# EAGLE board T11-MIDITheremin (EAGLE 7.7.0)
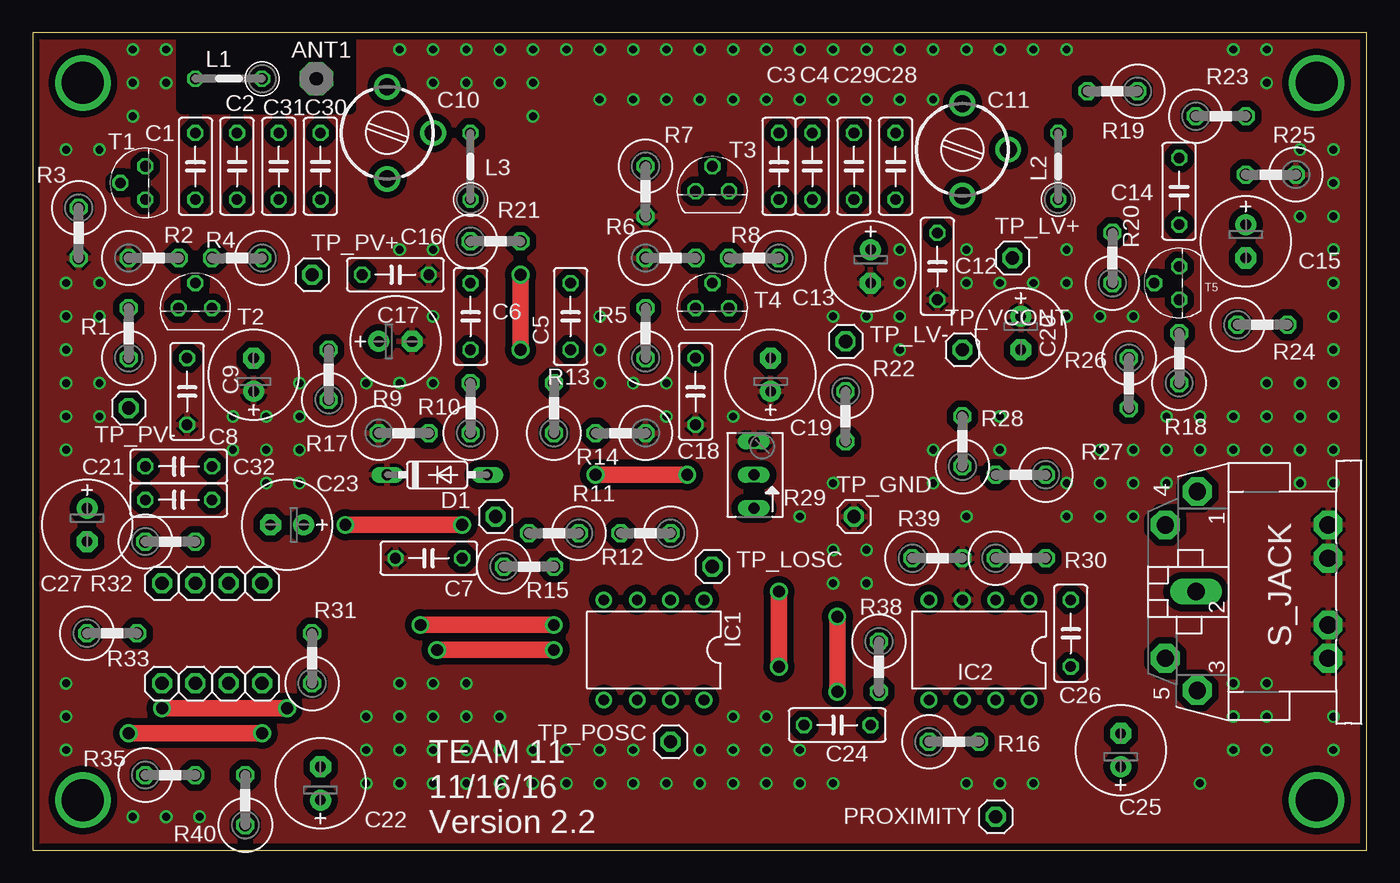
[diagram p0: board, top side]
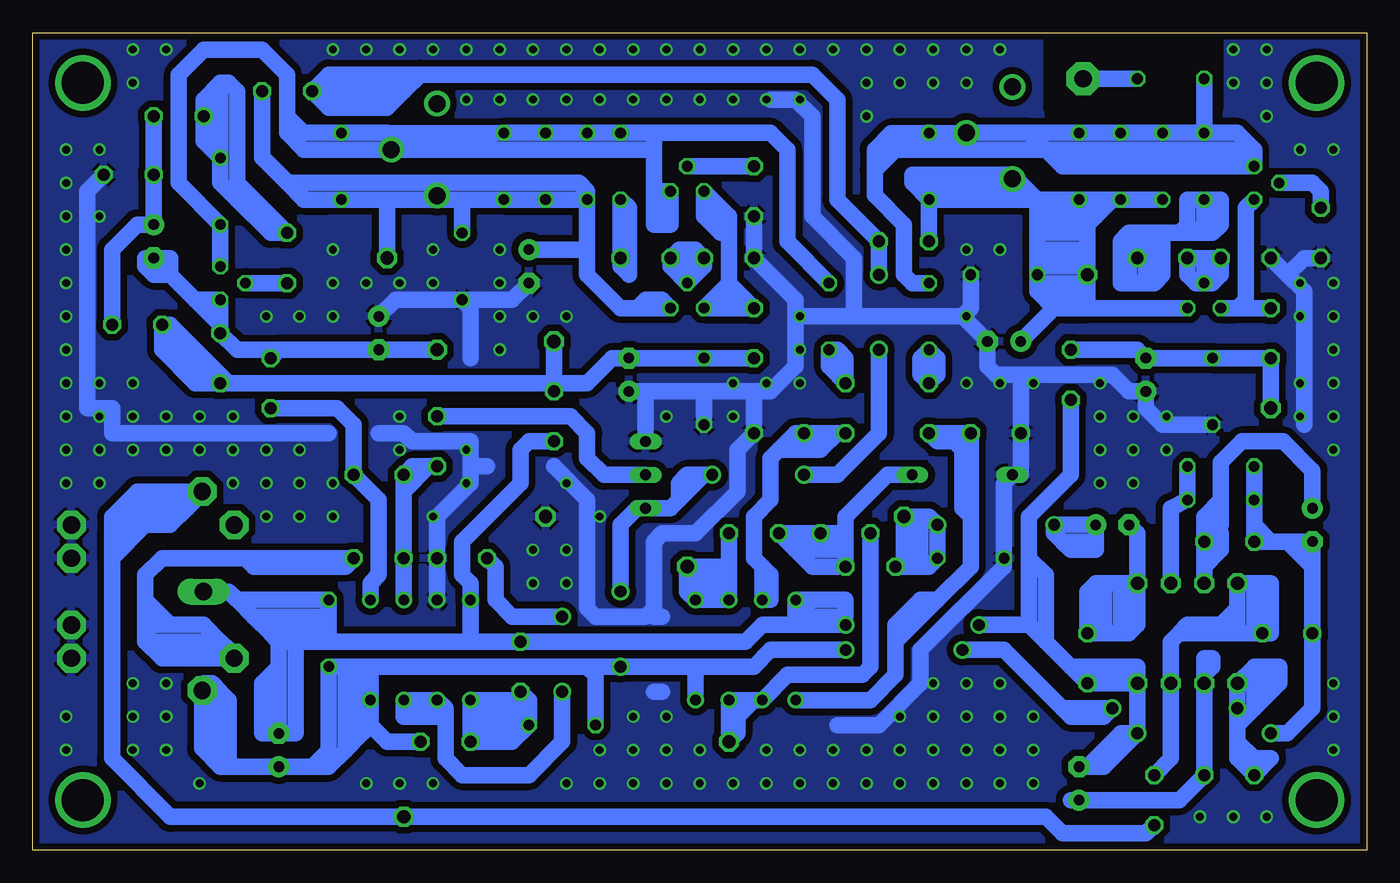
[diagram p1: board, bottom side, seen from below]

Size 101.6 x 62.23 mm. Coordinates in mm from the lower left corner, seen from the top.
Outline: 0,0 101.6,0 101.6,62.23 0,62.23 0,0
Copper layers (1*16): Top 0.0356mm / dielectric 1.5011mm / Bottom 0.0356mm
Design rules "OSH-Park-2-layer *": minimum track width 6mil, minimum drill 13mil, track to track 6mil, track to pad 6mil, pad to pad 6mil, via to via 6mil, smd to smd 6mil, copper to edge 15mil, drill to drill 6mil, minimum pad ring 7mil, minimum via ring 7mil, stop-mask expansion 3mil, vias tented up to drill 25mil, thermal gap 10mil
tRestrict: area 11.4,56.5 to 24.1,61.6
bRestrict: area 11.4,56.5 to 24.1,61.6

## Footprints (pad centres in the part's own frame; a part is rotated, then mirrored left to right if it is on the bottom)
PAD-01 = drill 1.321 pad 2.54 octagon: 1 0,0
C050-025X075 = drill 0.813 octagon: 1 -2.54,0; 2 2.54,0
E2,5-7 = drill 0.813 pad 1.6: + -1.27,0 | drill 0.813 pad 1.6 octagon: - 1.27,0
CTRIM3040.427 = drill 1.3: 1A -3.5,0; 1B 3.5,0; 2 0,-3.5
DO35-7 = drill 0.813 long: A 3.81,0; C -3.81,0
DIL08 = drill 0.813 pad 1.27: 1 -3.81,-3.81; 2 -1.27,-3.81; 3 1.27,-3.81; 4 3.81,-3.81; 5 3.81,3.81; 6 1.27,3.81; 7 -1.27,3.81; 8 -3.81,3.81
0207/5V = drill 0.813 octagon: 1 -2.54,0; 2 2.54,0
1X01 = drill 1.016 octagon: 1 0,0
0411V = drill 0.914 octagon: 1 -2.54,0; 2 1.27,0
B64Y = drill 0.813 long: A 2.54,0; E -2.54,0; S 0,0
CP-2350 = drill 1.321 pad 2.184 octagon: 1 7.62,12.58; 3 -7.52,12.58; 4 5.08,15.02; 5 -5.08,15.02; PE -2.54,2.62; PE1 -5.08,2.62; PE2 5.08,2.62; PE@ 2.54,2.62 | drill 1.321 long: 2 0,12.68
TO92 = drill 0.813 octagon: 1 1.27,0; 2 0,1.905; 3 -1.27,0

## Placement (x,y rotation side)
ANT1  5pF  [PAD-01]  21.59,58.74 0 top
C1  .01u  [C050-025X075]  12.38,52.07 270 top
C2  1.2nF  [C050-025X075]  15.56,52.07 90 top
C3  .01u  [C050-025X075]  56.83,52.07 270 top
C4  1.2nF  [C050-025X075]  59.37,52.07 90 top
C5  .01u  [C050-025X075]  40.96,40.64 270 top
C6  .01uF  [C050-025X075]  33.34,40.64 270 top
C7  4700pF  [C050-025X075]  30.16,22.23 180 top
C8  .1uF  [C050-025X075]  11.75,34.92 270 top
C9  4.7uF  [E2,5-7]  16.83,36.2 90 top
C10  [CTRIM3040.427]  26.99,54.61 90 top
C11  [CTRIM3040.427]  70.8,53.34 90 top
C12  .1uF  [C050-025X075]  68.9,44.45 270 top
C13  4.7uF  [E2,5-7]  63.82,44.45 270 top
C14  22pF  [C050-025X075]  87.31,50.16 90 top
C15  1uF  [E2,5-7]  92.39,46.35 270 top
C16  .1uF  [C050-025X075]  27.62,43.81 0 top
C17  4.7uF  [E2,5-7]  27.62,38.73 0 top
C18  .1uF  [C050-025X075]  50.48,34.92 270 top
C19  4.7uF  [E2,5-7]  56.2,36.2 90 top
C20  1uF  [E2,5-7]  75.25,39.37 270 top
C21  3900pF  [C050-025X075]  11.11,26.67 180 top
C22  10uF  [E2,5-7]  21.91,5.08 90 top
C23  10uF  [E2,5-7]  19.37,24.77 180 top
C24  .1uF  [C050-025X075]  61.28,9.53 0 top
C25  4.7uF  [E2,5-7]  82.87,7.62 90 top
C26  .1uF  [C050-025X075]  79.06,16.51 270 top
C27  1uF  [E2,5-7]  4.13,24.77 270 top
C28  tune  [C050-025X075]  65.72,52.07 90 top
C29  tune  [C050-025X075]  62.55,52.07 90 top
C30  tune  [C050-025X075]  21.91,52.07 90 top
C31  tune  [C050-025X075]  18.73,52.07 90 top
C32  3900pF  [C050-025X075]  11.11,29.21 180 top
D1  1N4148DO35-7  [DO35-7]  30.8,28.57 0 top
IC1  TL072P  [DIL08]  47.31,15.24 180 top
IC2  TL072P  [DIL08]  72.07,15.24 180 top
L1  2.5mH  [0207/5V]  14.92,58.74 180 top
L2  100uH  [0207/5V]  78.11,52.07 90 top
L3  100uH  [0207/5V]  33.34,52.07 90 top
LM2917_1  [1X01]  17.46,20.32 90 top
LM2917_2  [1X01]  14.92,20.32 90 top
LM2917_3  [1X01]  12.38,20.32 90 top
LM2917_4  [1X01]  9.84,20.32 90 top
LM2917_5  [1X01]  9.84,12.7 90 top
LM2917_6  [1X01]  12.38,12.7 90 top
LM2917_7  [1X01]  14.92,12.7 90 top
LM2917_8  [1X01]  17.46,12.7 90 top
PROXIMITY  [1X01]  73.34,2.54 0 top
R1  2k2  [0411V]  7.3,40.01 90 top
R2  1k  [0411V]  9.84,45.09 0 top
R3  1k  [0411V]  3.49,46.35 270 top
R4  10k  [0411V]  14.92,45.09 180 top
R5  2k2  [0411V]  46.67,40.01 90 top
R6  1k  [0411V]  49.21,45.09 0 top
R7  1k  [0411V]  46.67,49.53 270 top
R8  10k  [0411V]  54.29,45.09 180 top
R9  10k  [0411V]  28.89,31.75 0 top
R10  10k  [0411V]  33.34,34.29 90 top
R11  1k  [0411V]  39.05,24.13 180 top
R12  1k  [0411V]  46.04,24.13 180 top
R13  10k  [0411V]  39.69,34.29 90 top
R14  10k  [0411V]  44.13,31.75 180 top
R15  10k  [0411V]  38.42,21.59 0 top
R16  10k  [0411V]  70.8,8.26 0 top
R17  10  [0411V]  22.54,36.83 90 top
R18  10k  [0411V]  87.31,38.1 90 top
R19  10  [0411V]  81.6,57.78 180 top
R20  470  [0411V]  82.23,45.72 90 top
R21  10  [0411V]  35.88,46.35 0 top
R22  10  [0411V]  61.91,32.38 270 top
R23  33  [0411V]  91.12,55.88 0 top
R24  10k  [0411V]  94.3,40.01 0 top
R25  10k  [0411V]  93.66,51.44 180 top
R26  10k  [0411V]  83.5,34.92 270 top
R27  51k  [0411V]  74.61,28.57 180 top
R28  22k  [0411V]  70.8,31.75 90 top
R29  10k  [B64Y]  54.93,28.57 90 top
R30  100k  [0411V]  75.88,22.23 0 top
R31  100k  [0411V]  21.27,15.24 90 top
R32  100k  [0411V]  11.11,23.5 0 top
R33  10k  [0411V]  6.67,16.51 0 top
R35  470  [0411V]  11.11,5.71 0 top
R38  10k  [0411V]  64.45,13.34 270 top
R39  10  [0411V]  69.53,22.23 0 top
R40  100  [0411V]  16.19,4.45 90 top
S_JACK  MIDIJACK  [CP-2350]  101.28,19.68 90 top
T1  2N3904  [TO92]  8.57,50.8 90 top
T2  2N3904  [TO92]  12.38,41.27 0 top
T3  2N3904  [TO92]  51.75,50.16 0 top
T4  2N3904  [TO92]  51.75,41.27 0 top
T5  2N3904  [TO92]  87.31,43.18 90 top
TP_FOUT  [1X01]  35.24,25.4 0 top
TP_GND  [1X01]  62.55,25.4 0 top
TP_LOSC  [1X01]  51.75,21.59 0 top
TP_LV+  [1X01]  74.61,45.09 0 top
TP_LV-  [1X01]  61.91,38.73 0 top
TP_POSC  [1X01]  48.58,8.26 0 top
TP_PV+  [1X01]  21.27,43.81 0 top
TP_PV-  [1X01]  7.3,33.66 0 top
TP_VCONT  [1X01]  70.8,38.1 0 top

## Library data of the parts
ANT1 = discrete
C1-C9 C12-C32 L1-L3 R1-R28 R30 R38 R39 = resistor
C10 C11 R31-R33 R35 R40 = rcl
D1 = diode
IC1 IC2 = linear
LM2917_1-LM2917_8 PROXIMITY TP_FOUT TP_GND TP_LOSC TP_LV+ TP_LV- TP_POSC TP_PV+ TP_PV- TP_VCONT = pinhead
R29 = pot
S_JACK = adafruit
T1-T5 = transistor-neu-to92

## Nets
GND: C7.2 C8.2 C9.+ C12.2 C13.- C16.2 C17.- C18.2 C19.+ C20.+ D1.C IC2.3 R2.1 R3.2 R6.1 R7.2 R9.1 R14.1 R25.1 R29.A R39.2 S_JACK.PE S_JACK.PE1 S_JACK.PE2 S_JACK.PE@ TP_GND.1
L_OSC_V+: C4.1 C11.1A C12.1 C13.+ C28.1 C29.1 L2.1 R19.1 T4.1 TP_LV+.1
L_OSC_V-: C18.1 C19.- R5.1 R18.1 R22.1 R24.1 TP_LV-.1
LOCAL_RESONANCE: C3.1 C4.2 C5.1 C11.2 C14.1 C28.2 C29.2 L2.2 T3.1 T5.1
N$1: R1.2 T1.3 T2.3
N$2: R2.2 R4.2 T2.2
N$3: R3.1 T1.2
N$4: C1.1 C2.2 C6.1 C10.2 C30.2 C31.2 L1.2 L3.2 T1.1
N$5: C1.2 R4.1
N$6: R5.2 T3.3 T4.3
N$7: R6.2 R8.2 T4.2
N$8: R7.1 T3.2
N$9: C15.- C20.- R18.2 R26.1 T5.3 TP_VCONT.1
N$10: C5.2 R13.2
N$11: IC1.6 IC1.7 R11.2 TP_POSC.1
N$12: IC1.1 IC1.2 R12.1 TP_LOSC.1
N$13: IC1.5 R9.2 R10.1
N$14: D1.A R11.1 R12.2 R15.2
N$15: IC1.3 R13.1 R14.2
N$16: C3.2 R8.1
N$17: C6.2 R10.2
N$18: C7.1 C23.+ R15.1 TP_FOUT.1
N$20: C21.1 C32.1 LM2917_2.1
N$21: R20.1 T5.2
N$22: C14.2 R20.2 R23.1
N$23: C15.+ R23.2 R24.2 R25.2
N$24: IC2.1 R26.2 R27.1
N$25: IC2.2 R27.2 R28.1 R30.1
N$26: R28.2 R29.S
N$27: IC2.6 IC2.7 R39.1
N$28: ANT1.1 L1.1
N$31: C22.+ LM2917_6.1 R35.2
N$33: C27.+ LM2917_3.1 R32.2
N$34: C23.- LM2917_1.1 R31.2
N$36: C24.2 IC2.5 R16.1 R38.2
NON_INVERT_OUT: LM2917_4.1 LM2917_7.1 R33.2 R40.2
P_OSC_V+: C2.1 C10.1A C16.1 C17.+ C30.1 C31.1 L3.1 R21.1 T2.1 TP_PV+.1
P_OSC_V-: C8.1 C9.- R1.1 R17.2 TP_PV-.1
V+: C24.1 C25.+ C26.2 IC1.8 IC2.8 LM2917_5.1 R16.2 R19.2 R21.2 R29.E R35.1 S_JACK.3
V-: C21.2 C22.- C25.- C26.1 C27.- C32.2 IC1.4 IC2.4 LM2917_8.1 R17.1 R22.2 R31.1 R32.1 R33.1 R38.1 S_JACK.2
V_CONTROL: R30.2 S_JACK.5
VOUT: PROXIMITY.1 R40.1 S_JACK.1

## Tracks (layer width: path | path; a pad name or v marks a point on that pad's centre or on a via)
GND  (via drill 0.6)
  Bottom 1.27: R7.2 R6.1 43.5,41.91 43.5,40.64 | 4.76,32.38 4.76,42.55 6.03,43.81 | 6.03,43.81 R2.1 | C19.+ 54.93,34.92 | 54.93,34.92 50.48,34.92 | 50.48,34.92 46.67,34.92 | 46.67,34.92 45.4,34.92 43.5,36.83 43.5,40.64 | C18.2 50.48,34.92 | 26.35,36.2 19.37,36.2 18.1,34.92 C9.+ 16.83,33.66 15.56,32.38 C8.2 | 46.67,34.92 R14.1 47.94,30.48 47.94,27.3 51.12,24.13 53.66,24.13 54.29,23.5 54.29,18.41 54.93,17.78 58.74,17.78 59.37,18.41 59.37,26.67 61.91,29.21 | 26.35,36.2 R9.1 26.35,28.57 D1.C 27.62,27.94 C7.2 27.62,21.59 33.97,15.24 33.97,12.7 37.15,9.53 40.32,9.53 | 43.5,40.64 39.05,40.64 | IC2.3 R39.2 70.8,25.4 68.26,27.94 68.26,29.21 | 75.25,31.75 73.34,31.75 72.71,31.11 68.26,31.11 68.26,29.21 | 79.06,31.75 95.57,31.75 95.57,33.66 97.47,33.66 97.47,50.16 R25.1 | R29.A 54.93,34.92 | 68.26,37.47 68.26,41.27 C12.2 | 66.99,29.21 68.26,29.21 | 45.4,57.15 43.5,57.15 42.23,55.88 42.23,48.26 39.05,45.09 39.05,40.64 | 54.29,17.78 53.66,17.78 | 53.66,12.06 54.29,12.06 | C20.+ 73.98,41.91 C12.2 | C12.2 65.09,41.91 C13.- | R3.2 4.76,45.09 6.03,43.81 | 26.35,36.2 28.26,36.2 28.89,36.83 C17.- 30.8,40.64 | 39.05,40.64 30.8,40.64 | C16.2 30.16,41.27 30.8,40.64
  other vias: 27.94,10.16 30.48,10.16 25.4,10.16 27.94,12.7 30.48,12.7 33.02,12.7 33.02,10.16 35.56,10.16 25.4,7.62 27.94,7.62 30.48,7.62 33.02,7.62 35.56,7.62 25.4,5.08 27.94,5.08 30.48,5.08 33.02,5.08 35.56,5.08 38.1,5.08 38.1,7.62 40.64,7.62 40.64,5.08 43.18,5.08 43.18,7.62 45.72,7.62 45.72,5.08 48.26,5.08 50.8,5.08 53.34,5.08 55.88,5.08 53.34,7.62 50.8,7.62 53.34,10.16 55.88,10.16 55.88,7.62 58.42,7.62 58.42,5.08 60.96,5.08 10.16,2.54 7.62,2.54 2.54,7.62 2.54,33.02 2.54,35.56 5.08,35.56 5.08,33.02 2.54,30.48 17.78,30.48 17.78,27.94 20.32,27.94 20.32,33.02 20.32,30.48 17.78,33.02 20.32,35.56 15.24,33.02 15.24,30.48 27.94,35.56 30.48,35.56 25.4,35.56 43.18,35.56 45.72,35.56 48.26,33.02 48.26,35.56 53.34,33.02 2.54,38.1 2.54,40.64 5.08,40.64 5.08,43.18 2.54,43.18 2.54,53.34 5.08,53.34 7.62,55.88 7.62,60.96 7.62,58.42 10.16,58.42 10.16,60.96 38.1,58.42 35.56,58.42 33.02,58.42 30.48,58.42 30.48,60.96 33.02,60.96 35.56,60.96 38.1,60.96 27.94,60.96 30.48,45.72 27.94,45.72 30.48,40.64 43.18,38.1 43.18,40.64 40.64,60.96 43.18,60.96 45.72,60.96 48.26,60.96 50.8,60.96 53.34,60.96 55.88,60.96 58.42,60.96 78.74,60.96 76.2,60.96 73.66,60.96 71.12,60.96 68.58,60.96 66.04,60.96 63.5,60.96 60.96,60.96 93.98,60.96 91.44,60.96 93.98,58.42 99.06,53.34 96.52,53.34 99.06,50.8 99.06,48.26 96.52,48.26 78.74,45.72 78.74,43.18 76.2,43.18 73.66,43.18 71.12,43.18 71.12,45.72 66.04,45.72 66.04,43.18 66.04,40.64 63.5,40.64 60.96,40.64 66.04,38.1 78.74,40.64 81.28,40.64 83.82,40.64 99.06,45.72 99.06,43.18 99.06,40.64 99.06,38.1 99.06,35.56 96.52,35.56 93.98,35.56 99.06,33.02 96.52,33.02 93.98,33.02 91.44,33.02 88.9,33.02 86.36,33.02 99.06,30.48 96.52,30.48 93.98,30.48 91.44,30.48 88.9,30.48 96.52,27.94 99.06,27.94 86.36,30.48 83.82,30.48 81.28,30.48 83.82,27.94 86.36,27.94 83.82,25.4 81.28,25.4 78.74,25.4 81.28,27.94 78.74,27.94 73.66,33.02 73.66,30.48 71.12,25.4 68.58,27.94 63.5,20.32 63.5,22.86 60.96,22.86 60.96,20.32 58.42,25.4 60.96,27.94 68.58,30.48 2.54,10.16 2.54,12.7 12.7,2.54 76.2,5.08 73.66,5.08 71.12,5.08 91.44,7.62 88.9,5.08 99.06,7.62 99.06,10.16 91.44,10.16 93.98,10.16 93.98,7.62 93.98,12.7 91.44,12.7 43.18,57.15 45.72,57.15 48.26,57.15 50.8,57.15 55.88,57.15 53.34,57.15 58.42,57.15 60.96,57.15 63.5,57.15 66.04,57.15 68.58,57.15 38.1,55.88
  pour Bottom (isolate 0.508): 0,0 101.6,-0.64 101.6,62.23 0,62.23
  pour Top (isolate 0.508): 0,0 101.6,0 101.6,62.23 0,62.23
L_OSC_V+
  Bottom 0.406: L2.1 80.33,49.53 84.14,53.34
  Bottom 1.27: 55.56,41.27 T4.1 53.66,41.91 54.93,41.91 55.56,41.27 | 55.56,41.27 56.83,41.27 59.37,43.81 59.37,45.72 | C4.1 C29.1 C28.1 68.9,49.53 | C4.1 59.37,45.72 | 68.9,49.53 70.8,49.53 | 70.8,49.53 74.61,49.53 | 74.61,49.53 L2.1 79.02,49.53 | C13.+ 59.37,45.72 | C12.1 68.9,49.53 | C11.1A 70.8,49.53 | 79.1,49.53 80.96,49.53 82.23,50.8 | TP_LV+.1 74.61,49.53 | 82.23,50.8 84.14,52.7 84.14,53.34 R19.1 | C4.1 59.37,50.16 60.01,50.8 82.23,50.8
L_OSC_V-
  Bottom 1.27: R5.1 C18.1 C19.- 57.47,37.47 59.37,35.56 61.91,35.56 | 86.68,35.56 R18.1 88.58,35.56 | 86.68,35.56 61.91,35.56 | TP_LV-.1 61.91,35.56 | 61.91,35.56 R22.1 | 88.58,35.56 89.22,35.56 91.76,38.1 91.76,39.37 | 91.76,39.37 R24.1 91.12,40.01 86.68,35.56 | 88.58,35.56 88.58,36.2 91.76,39.37
LOCAL_RESONANCE
  Bottom 0.406: 74.61,54.61 74.61,54.57
  Bottom 1.27: 54.29,54.61 45.4,54.61 44.13,53.34 44.13,46.35 C5.1 | 54.29,54.61 C3.1 C4.2 C29.2 C28.2 66.4,54.57 74.61,54.57 74.3,54.26 C11.2 | 54.29,50.16 T3.1 53.02,48.9 | 53.02,48.9 54.29,50.16 | 53.02,48.9 53.02,47.62 54.29,47.62 54.29,50.16 | 54.29,50.16 54.29,53.34 | 54.29,53.34 54.29,54.61 | T5.1 C14.1 90.49,50.8 90.49,59.05 88.58,60.96 84.14,60.96 82.23,59.05 82.23,55.88 | 78.46,54.61 80.96,54.61 82.23,55.88 | 82.23,55.88 82.23,54.61 80.96,53.34 54.29,53.34 | L2.2 74.61,54.61
N$1
  Bottom 1.27: R1.2 T2.3 9.84,41.27 9.21,41.91 9.21,48.9 T1.3
N$2
  Bottom 1.27: 12.38,45.09 R4.2 13.65,43.81 13.02,43.18 11.75,43.18 11.11,43.81 R2.2 12.38,45.09 | T2.2 12.38,45.09
N$3
  Bottom 1.27: R3.1 3.49,50.16 4.13,50.8 T1.2
N$4
  Bottom 1.27: 25.72,54.61 C30.2 C31.2 C2.2 C1.1 | 8.57,53.34 T1.1 23.18,52.07 24.45,53.34 | 8.57,53.34 9.84,54.61 C1.1 | C6.1 34.61,43.18 35.24,43.81 35.24,47.62 37.47,49.85 37.47,51.75 | 25.72,54.61 24.45,53.34 | 24.45,53.34 8.57,53.34 | 33.34,54.57 30.53,54.57 C10.2 25.72,54.61 | 33.34,54.57 L3.2 | L1.2 C1.1 | 33.34,54.57 36.23,54.57 37.47,53.34 | 37.47,53.34 37.47,51.75 | 37.47,53.34 24.45,53.34 | 37.47,51.75 34.92,54.29
N$5
  Bottom 1.27: R4.1 17.46,46.35 16.83,46.99 | C1.2 12.38,47.62 13.02,46.99 | 13.02,46.99 14.29,46.99 | 14.29,46.99 15.56,46.99 | 15.56,46.99 16.83,46.99 | 15.56,46.99 15.56,43.81 16.19,43.18 16.83,43.18 | 18.1,43.18 18.73,43.18 18.73,46.35 18.1,46.99 16.83,46.99 | 16.83,46.99 16.83,43.18 | 16.83,43.18 18.1,43.18 | 18.1,43.18 18.1,45.72 | 13.02,46.99 11.75,46.99 11.11,47.62 11.11,49.53 13.65,49.53 13.65,47.62 14.29,46.99
N$6
  Bottom 1.27: 48.58,43.18 T4.3 R5.2 | 48.58,43.18 48.58,48.26 T3.3 50.48,48.26 49.21,46.99 49.21,47.62 49.85,48.26 | R5.2 48.58,43.18 | R5.2 47.94,41.27 48.58,41.91
N$7
  Bottom 1.27: R8.2 51.75,45.09 | 51.75,45.09 R6.2 | T4.2 51.75,45.09 | R6.2 51.12,45.72 52.39,45.72 R8.2 | R8.2 53.02,44.45 T4.2 | T4.2 50.48,44.45 R6.2
N$8
  Bottom 1.27: T3.2 R7.1
N$9
  Bottom 1.27: 87.31,40.01 T5.3 89.22,41.91 | 87.31,40.01 R18.2 86.04,38.1 82.87,38.1 | C15.- 91.12,43.81 | 91.12,43.81 89.22,41.91 | C15.- 91.12,45.09 91.12,43.81 | C15.- 93.03,45.09 93.03,44.45 92.39,43.81 91.12,43.81 | 87.31,40.01 89.22,41.91 | TP_VCONT.1 C20.- 82.87,38.1 | 82.87,38.1 R26.1
N$10
  Bottom 1.27: R13.2 40.96,36.83 C5.2 40.32,38.1 39.69,37.47 R13.2
N$11
  Bottom 1.27: IC1.6 IC1.7 TP_POSC.1 47.94,8.89 47.94,10.16 46.67,11.43 IC1.6 | IC1.6 44.13,13.34 38.42,13.34 37.78,13.97 R11.2
N$12
  Bottom 1.27: 48.58,20.32 IC1.2 IC1.1 51.75,19.68 51.75,20.32 | 48.58,21.59 R12.1 | 51.75,20.32 TP_LOSC.1 48.58,21.59 | 48.58,21.59 48.58,20.32 | 48.58,20.32 51.75,20.32
N$13
  Bottom 1.27: IC1.5 37.78,11.43 35.88,13.34 35.88,15.88 | 30.16,25.4 30.16,21.59 32.7,19.05 | 30.16,25.4 R9.2 R10.1 32.7,31.11 31.43,31.11 30.8,30.48 30.8,26.04 30.16,25.4 | 32.7,19.05 35.88,15.88 | 35.88,15.88 35.88,17.14 33.97,19.05 32.7,19.05
N$14
  Bottom 1.27: 39.69,24.13 39.69,25.4 36.51,28.57 D1.A | 39.69,24.13 39.69,22.86 | 39.69,22.86 R15.2 | 39.69,24.13 R11.1 R12.2 43.5,22.86 | 40.32,21.59 42.23,21.59 43.5,22.86 | 43.5,22.86 39.69,22.86
N$15
  Bottom 1.27: 40.32,31.75 R14.2 43.5,31.75 44.77,30.48 | 40.32,31.75 R13.1 | 46.04,21.59 IC1.3 45.4,19.05 45.4,20.95 46.04,21.59 | 46.04,21.59 46.67,22.23 46.67,25.4 45.4,26.67 45.4,29.84 44.77,30.48 | 40.32,31.75 41.59,30.48 44.77,30.48
N$16
  Bottom 1.27: C3.2 R8.1 56.83,44.45 56.2,43.81 56.2,48.9 C3.2
N$17
  Bottom 1.27: C6.2 R10.2 | R10.2 32.7,36.2 32.7,37.47 C6.2 | C6.2 33.97,37.47 33.97,36.2 R10.2
N$18  (via drill 0.9)
  Top 1.27: v23.81,24.77 v32.7,24.77
  Bottom 1.27: R15.1 35.24,21.59 | 33.97,21.59 33.34,21.59 C7.1 v32.7,24.77 33.34,25.4 33.97,25.4 | 22.54,24.77 v23.81,24.77 | v23.81,24.77 C23.+ 20.64,23.5 | 33.97,25.4 TP_FOUT.1 35.24,21.59 | 35.24,21.59 33.97,21.59 | 33.97,21.59 33.97,25.4 | 20.64,23.5 20.64,22.86 22.54,22.86 23.18,23.5 | 23.18,23.5 23.81,24.13 v23.81,24.77 | 20.64,23.5 23.18,23.5
N$20
  Bottom 1.27: LM2917_2.1 14.92,26.04 C21.1 C32.1
N$21
  Bottom 1.27: T5.2 R20.1
N$22
  Bottom 1.27: C14.2 88.58,53.98 R23.1 88.58,57.15 87.31,58.42 86.68,58.42 | 86.04,49.53 83.5,46.99 R20.2 86.04,50.8 | C14.2 87.31,50.8 86.04,49.53 | 86.68,58.42 87.31,57.78 C14.2 | 86.04,49.53 86.04,50.8 | 86.04,50.8 86.04,57.78 86.68,58.42
N$23
  Bottom 1.27: R24.2 95.57,45.72 93.66,47.62 C15.+ R25.2 R23.2
N$24
  Bottom 1.27: IC2.1 75.88,20.32 75.25,20.95 75.25,26.67 R27.1 77.15,32.38 78.42,33.66 R26.2
N$25
  Bottom 1.27: IC2.2 R30.1 73.34,27.3 | 73.34,27.3 R27.2 72.71,29.21 R28.1 71.44,29.21 73.34,27.3
N$26
  Bottom 1.27: R28.2 60.64,33.02 59.37,31.75 59.37,29.84 58.1,28.57 R29.S
N$27  (via drill 0.9)
  Top 1.27: v61.28,17.78 v61.28,12.06
  Bottom 1.27: 70.17,10.16 70.17,10.79 IC2.6 IC2.7 73.34,10.16 70.17,10.16 | 70.17,10.16 70.17,6.99 68.9,5.71 63.82,5.71 61.28,8.26 v61.28,12.06 | v61.28,17.78 65.09,17.78 66.36,19.05 66.36,21.59 R39.1
N$28
  Bottom 1.27: L1.1 ANT1.1
N$29  (via drill 3.2)
  other vias: 97.79,3.81
N$30  (via drill 3.2)
  other vias: 97.79,58.42
N$31
  Bottom 1.27: 22.54,3.81 C22.+ 14.29,3.81 R35.2 LM2917_6.1 12.38,13.34 | 12.38,13.34 12.38,14.61 11.75,14.61 11.75,13.97 12.38,13.34
N$32  (via drill 3.2)
  other vias: 3.81,58.42
N$33
  Bottom 1.27: LM2917_3.1 12.38,21.59 | 12.38,21.59 R32.2 | 11.11,26.67 11.11,29.53 9.53,31.11 6.35,31.11 4.13,28.89 C27.+ | 11.11,26.67 11.11,24.77 R32.2 | R32.2 12.38,25.4 11.11,26.67 | 11.11,24.13 11.11,22.86 12.38,21.59
N$34
  Bottom 1.27: 20,16.51 18.73,16.51 | 18.73,16.51 18.1,16.51 17.46,17.14 LM2917_1.1 17.46,24.13 C23.- | 18.1,20.32 18.73,20.32 | 20,20.32 20.64,20.32 21.27,19.68 R31.2 20,16.51 | 20,16.51 20,20.32 | 20,20.32 18.73,20.32 | 18.73,20.32 18.73,16.51
N$36
  Bottom 1.27: 68.26,10.16 IC2.5 65.09,11.43 | 68.26,10.16 68.26,9.53 | 68.26,10.16 65.72,10.16 64.45,11.43 R38.2 63.82,11.43 C24.2 65.09,8.26 R16.1 68.26,9.53 | 68.26,9.53 65.09,9.53 64.45,10.16
N$37  (via drill 3.2)
  other vias: 3.81,3.81
NON_INVERT_OUT
  Bottom 1.27: 9.84,16.51 9.84,18.41 | 9.84,18.41 LM2917_4.1 8.57,20.32 | 14.29,16.51 14.92,15.88 LM2917_7.1 14.92,6.99 R40.2 | 14.29,16.51 9.84,16.51 | 9.84,16.51 8.57,16.51 | 8.57,16.51 R33.2 7.3,16.51 7.3,20.32 8.57,20.32 | 8.57,20.32 8.57,16.51 | 14.29,16.51 13.65,17.14 11.11,17.14 9.84,18.41
P_OSC_V+
  Bottom 1.27: T2.1 21.27,41.27 | 23.81,41.27 C17.+ | 25.08,43.18 C16.1 25.08,44.45 | 25.08,43.18 25.08,42.55 23.81,41.27 | C2.1 C31.1 19.37,49.53 | 19.37,49.53 C30.1 25.08,49.53 | 25.08,49.53 26.99,49.53 | 26.99,49.53 L3.1 | 25.08,45.72 25.08,46.99 | 25.08,48.26 25.08,49.53 | 23.81,41.27 21.27,41.27 | 21.27,41.27 21.27,41.91 | 21.27,41.91 21.27,43.18 | 21.27,43.18 TP_PV+.1 21.27,44.45 | R21.1 L3.1 | C10.1A 26.99,49.53 | 33.34,50.16 33.34,50.8 | 21.27,44.45 21.27,45.72 | 21.27,46.99 21.27,47.62 20.64,48.26 | 19.37,49.53 20.64,48.26 | 20.64,48.26 25.08,48.26 | 25.08,48.26 25.08,46.99 | 25.08,46.99 21.27,46.99 | 21.27,46.99 21.27,45.72 | 21.27,45.72 25.08,45.72 | 25.08,45.72 25.08,44.45 | 25.08,44.45 21.27,44.45 | 21.27,43.18 25.08,43.18 | 25.08,43.18 23.81,41.91 21.27,41.91 | 25.08,49.53 26.99,51.44 34.61,51.44 34.61,50.8 L3.1 | L3.1 33.34,50.16 | 33.34,50.16 26.35,50.16
P_OSC_V-
  Bottom 1.27: R17.2 17.46,38.1 C9.- C8.1 R1.1 TP_PV-.1
V+  (via drill 0.9)
  Top 1.27: v37.15,38.1 v37.15,43.81 | v56.83,13.97 v56.83,19.68 | v49.85,28.57 v42.86,28.57 | v39.69,15.24 v30.8,15.24 | v9.84,10.79 v19.37,10.79
  Bottom 1.27: 75.88,13.97 IC2.8 75.88,9.53 | 51.12,13.97 v56.83,13.97 59.37,13.97 | v42.86,28.57 40.32,28.57 37.15,31.75 v37.15,38.1 | 75.88,13.97 76.52,13.97 | 77.79,13.97 C26.2 79.06,7.62 | 75.88,13.97 59.37,13.97 | R16.2 74.61,8.26 75.88,9.53 | C24.1 58.74,13.34 59.37,13.97 | 9.84,9.53 v9.84,10.79 LM2917_5.1 | 9.84,9.53 9.84,8.26 | 9.84,8.26 9.84,6.99 R35.1 7.3,6.99 8.57,6.99 9.84,8.26 | IC1.8 51.12,13.97 | 51.12,13.97 46.67,13.97 45.4,15.24 v39.69,15.24 | v30.8,15.24 27.62,15.24 23.18,10.79 | 23.18,10.79 v19.37,10.79 20,10.16 22.54,10.16 23.18,10.79 | v49.85,28.57 50.48,28.57 | 50.48,28.57 51.75,28.57 52.39,27.94 52.39,26.67 | 52.39,26.67 53.02,26.04 R29.E 55.56,26.04 56.83,24.77 v56.83,19.68 | v37.15,43.81 R21.2 40.32,49.53 40.32,57.15 42.23,59.05 72.07,59.05 | LM2917_5.1 8.57,12.7 | 8.57,12.7 8.57,12.06 | 8.57,10.79 9.84,9.53 | LM2917_5.1 8.57,13.97 | 8.57,13.97 8.57,12.7 | 8.57,13.97 6.67,13.97 6.67,12.7 8.57,10.79 | 8.57,10.79 8.57,12.06 | 8.57,12.06 7.3,13.34 | 50.48,28.57 52.39,26.67 | R19.2 79.06,59.05 72.07,59.05 | S_JACK.3 88.7,7.74 87.31,6.35 86.68,6.35 | 86.68,6.35 C25.+ 80.33,6.35 | 80.33,6.35 79.06,6.35 | 77.79,7.62 76.52,8.89 | 76.52,8.89 75.88,9.53 | 79.06,7.62 79.06,6.35 | 79.06,6.35 77.79,7.62 | 77.79,7.62 77.79,13.97 | 77.79,13.97 76.52,13.97 | 76.52,13.97 76.52,8.89 | 79.06,7.62 80.33,6.35 | 88.58,12.7 87.95,12.7 87.31,12.06 | 87.31,12.06 86.68,11.43 86.68,6.35 | 86.68,6.35 87.95,7.62 87.95,11.43 87.31,12.06 | R19.2 79.06,56.52 74.61,56.52 73.34,57.78 | 72.07,59.05 73.34,57.78 | 73.34,57.78 R19.2
V-  (via drill 0.9)
  Top 1.27: v39.69,17.14 v29.53,17.14 | v17.46,8.89 v7.3,8.89
  Bottom 1.27: 43.5,17.78 IC1.4 39.69,19.05 39.69,17.78 42.23,17.78 42.86,18.41 43.5,17.78 | 43.5,17.78 43.5,17.14 | 68.26,15.88 IC2.4 68.26,20.32 68.9,20.95 68.9,23.5 64.45,27.94 64.45,30.48 63.82,31.11 R22.2 | 43.5,17.14 v39.69,17.14 | 25.72,22.23 25.72,25.4 22.54,28.57 R17.1 | 25.72,22.23 25.72,17.14 | 43.5,17.14 46.04,17.14 47.31,15.88 R38.1 68.26,15.88 | 68.26,15.88 79.06,15.88 | v17.46,8.89 20,6.35 21.27,6.35 | 21.27,6.35 C22.- | LM2917_8.1 v17.46,8.89 | 8.57,24.77 C21.2 C32.2 | 8.57,24.77 R32.1 7.3,23.5 | 7.3,23.5 6.03,23.5 | 6.03,23.5 C27.- 4.13,21.59 | 4.13,21.59 R33.1 4.13,10.79 6.03,8.89 v7.3,8.89 | LM2917_8.1 R31.1 22.54,13.97 | 22.54,13.97 24.45,15.88 | 24.45,15.88 25.72,17.14 | v29.53,17.14 25.72,17.14 | 7.3,23.5 8.57,24.77 | 4.13,21.59 6.03,23.5 | 24.45,15.88 24.45,20.95 25.72,22.23 | v17.46,8.89 18.73,8.89 21.27,6.35 | LM2917_8.1 17.46,13.97 22.54,13.97 | S_JACK.2 86.68,19.68 86.04,19.05 | C25.- 82.87,13.97 | 82.87,13.97 82.87,15.88 | 82.87,15.88 83.5,16.51 | 83.5,16.51 84.77,17.78 | 79.06,17.78 C26.1 86.04,19.05 | 79.06,16.51 79.06,15.88 | 79.06,15.88 81.6,15.88 | 81.6,15.88 82.87,15.88 | 81.6,15.88 81.6,8.89 C25.- | C25.- 84.14,8.89 84.14,12.7 82.87,13.97 | 86.04,19.05 84.77,17.78 | 84.77,17.78 79.06,17.78 | 79.06,17.78 79.06,16.51 | 79.06,16.51 83.5,16.51
V_CONTROL
  Bottom 1.27: S_JACK.5 86.68,14.61 | 86.68,14.61 91.76,14.61 93.03,15.88 93.03,16.51 | 93.03,17.14 93.03,19.05 | 93.03,19.05 93.03,20.95 91.76,22.23 85.41,22.23 | 85.41,22.23 R30.2 77.79,21.59 84.77,21.59 85.41,22.23 | 86.68,14.61 86.68,15.24 87.31,15.88 | 87.31,15.88 88.58,17.14 91.12,17.14 | 91.12,17.14 93.03,17.14 | 93.03,17.14 93.03,16.51 | 93.03,16.51 92.39,15.88 87.31,15.88 | 91.12,17.14 93.03,19.05
VOUT
  Bottom 1.27: R40.1 16.83,1.27 23.18,1.27 24.45,2.54 PROXIMITY.1 91.12,2.54 95.57,6.99 95.57,22.23 | S_JACK.1 93.66,27.3 95.57,25.4 95.57,24.13 | 88.58,27.3 89.85,26.04 | 89.85,26.04 91.12,24.77 93.03,24.77 95.57,22.23 | 95.57,22.23 95.57,24.13 | 95.57,24.13 93.66,26.04 93.03,26.04 | 89.85,26.04 93.03,26.04 | 93.03,26.04 94.93,24.13

## Text on the board
tNames: TEAM 11 / 11/16/16 / Version 2.2